# Altium PCB PCB1.PcbDoc
Units mm, origin at the board's own origin, x right, y up, seen from the top; angles counter-clockwise.
Board outline 64 x 36 mm, 2 copper layers (Top Layer, Bottom Layer); 12 components, 8 nets, 40 pads, 0 vias.
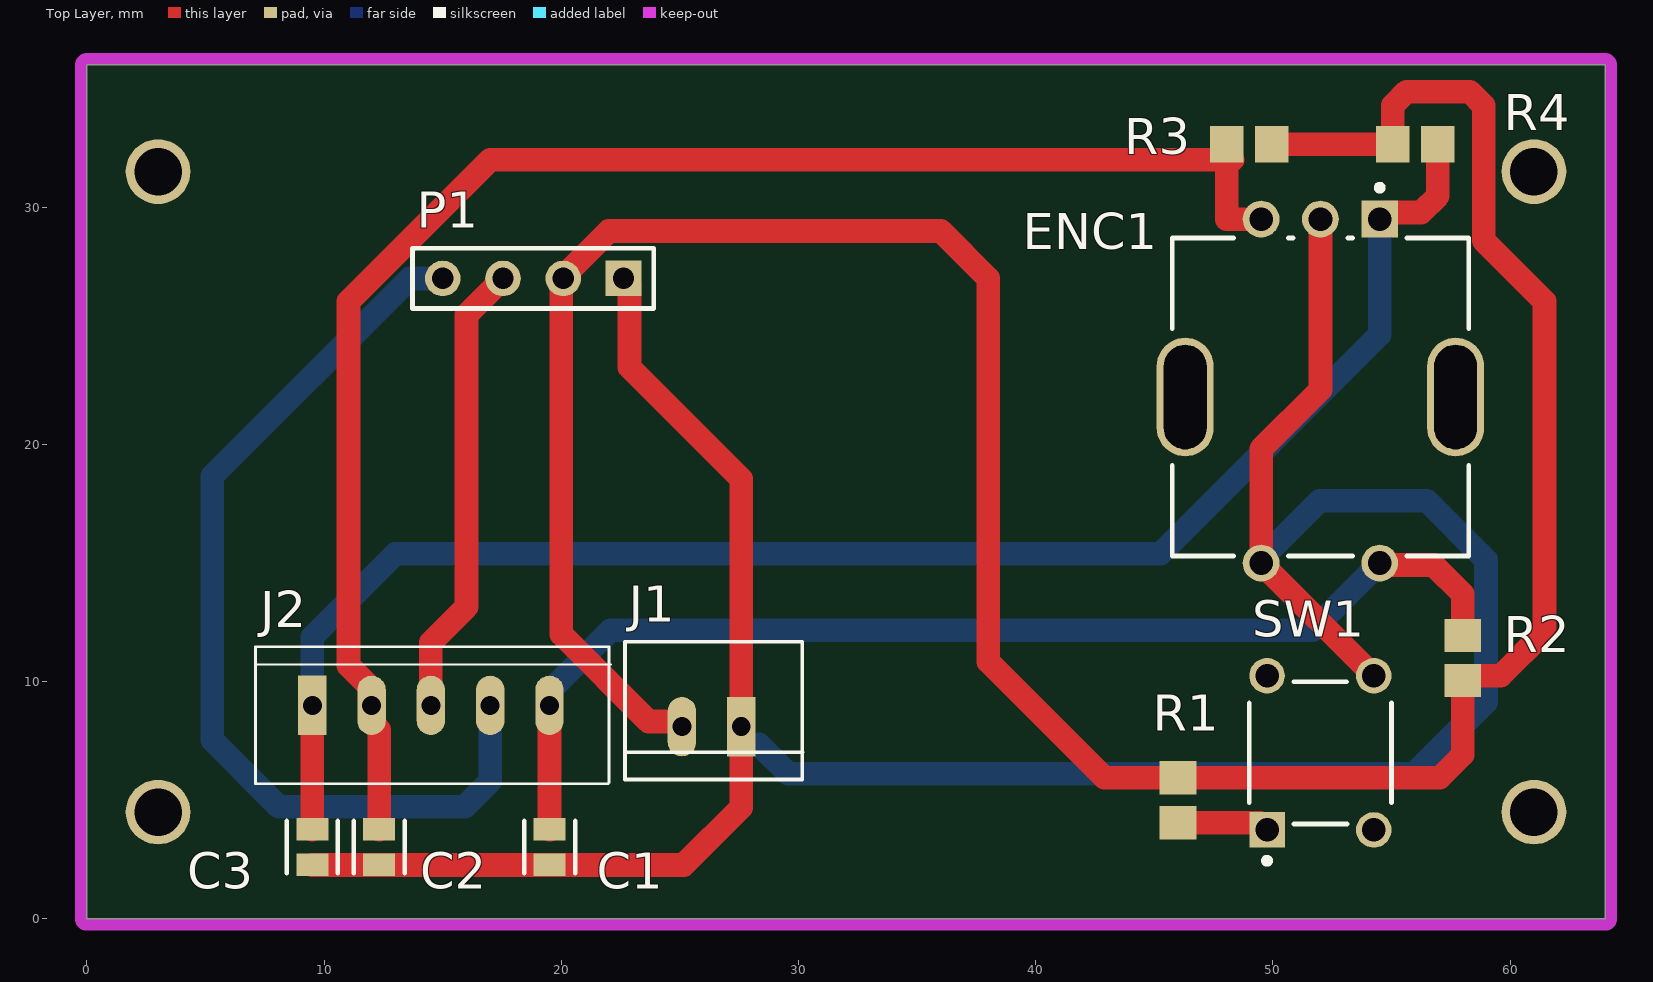
[diagram p0: Top Layer view]
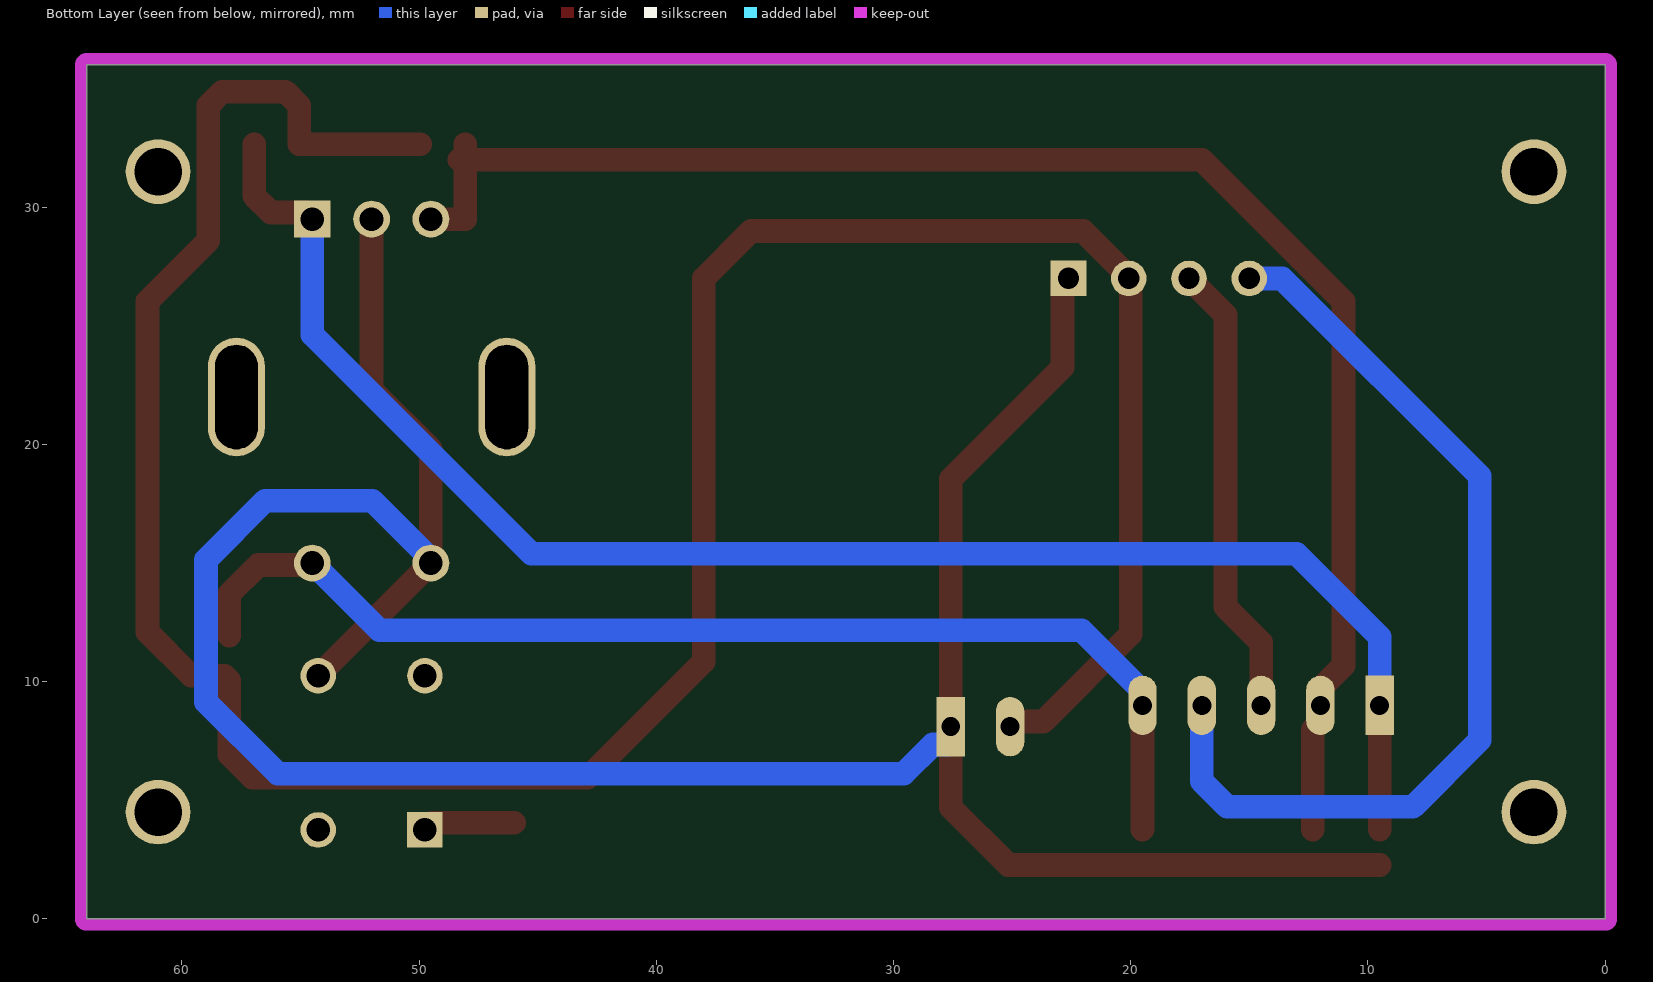
[diagram p1: Bottom Layer view, seen from below]
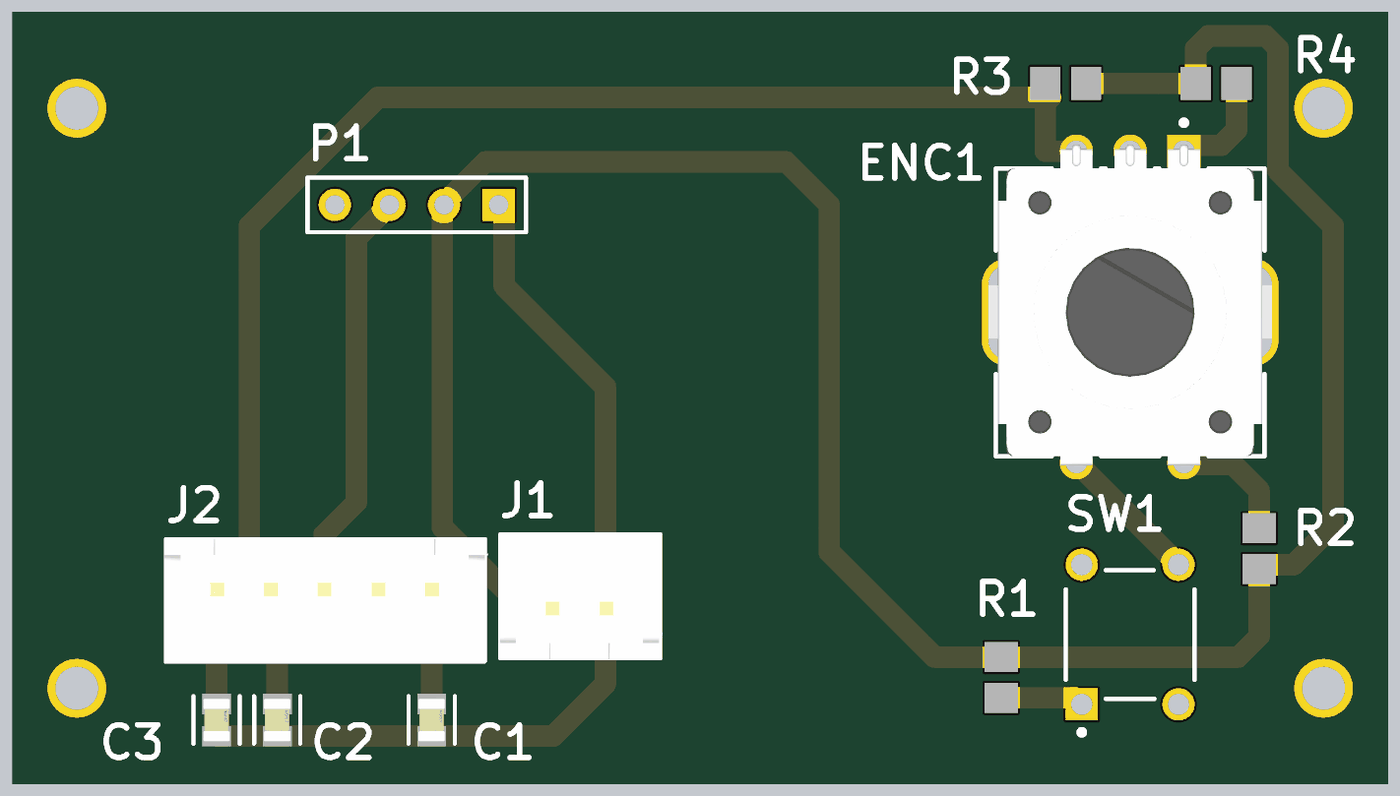
[diagram p2: 3D render of the assembled board from above, using the file's embedded part models]

## Layer stack, top to bottom
Top Solder: solder mask 0.0102, Solder Resist, Dk 3.5
Top Layer: signal copper 0.0356
Dielectric 1: dielectric 0.32, FR-4, Dk 4.8
Bottom Layer: signal copper 0.0356
Bottom Solder: solder mask 0.0102, Solder Resist, Dk 3.5

## Board outline
0,0 64,0 64,36 0,36

## Design rules (kind name [scope] priority, off if disabled: settings)
Clearance [All] p1: gap=0.254 ignorepadtopadclearanceinfootprint=FALSE except(0.3: Arc-Arc Arc-Track Track-Track)
PolygonConnect [All] p1: connectstyle=Relief reliefconductorwidth=0.254 reliefentries=4 polygonreliefangle="90 Angle" airgapwidth=0.254
RoutingVias [All] p1: holewidth=0.711 width=1.27 viastyle="Through Hole" minholewidth=0.711 minwidth=1.27 maxholewidth=0.711 maxwidth=1.27
SolderMaskExpansion [All] p1: expansion=0.102 istentingtop=FALSE
Width [All] p1: maxlimit=1 minlimit=1 preferedwidth=1 minimp=50.000000 maximp=50.000000 favimp=50.000000
30 further rules are at their usual default settings.

## Components (designator, comment, footprint, x,y, rotation, side; value= is the part's Value field where it differs from the comment)
C1 "C0805C104K5RACTU" FP-C0805C-DN-MFG 19.507,3.023 r270 top value="0.10 μF"
C2 "C0805C104K5RACTU" FP-C0805C-DN-MFG 12.319,3.023 r270 top value="0.10 μF"
C3 "C0805C104K5RACTU" FP-C0805C-DN-MFG 9.5,3.023 r270 top value="0.10 μF"
ENC1 "PEC11R-4215F-S0024" FP-PEC11R-4215F-S0024-MFG 52,22 r180 top
J1 "Power" JST_2P 27.584,8.103 r270 top
J2 "JST_5P" JST_5P 19.5,9 r90 top
P1 "OLED" HDR1X4 22.62,27 r180 top
R1 "ERA6AEB332V" RESC2013X60X40ML20T25 46,5 r270 top
R2 "ERA6AEB332V" RESC2013X60X40ML20T25 58,11 r270 top
R3 "ERA6AEB332V" RESC2013X60X40ML20T25 49,32.654 r0 top
R4 "ERA6AEB332V" RESC2013X60X40ML20T25 56,32.654 r180 top
SW1 "1825910-6" TECO-1825910-6_V 52,7 r90 top

## Footprints (in the part's own frame and the unit in brackets; to place one, negate y for a bottom-side part, rotate by r counter-clockwise, add the part's x,y. Pads: shape width x height; smd on the part's side, far side on the other; paste and mask are expansions set on the pad)
FP-C0805C-DN-MFG [mm]
  rect 0.95x1.35 smd paste+0 mask+0: 1(-0.75,0) 2(0.75,0)
  silkscreen extent -1.1,-1.07 1.1,1.07, body extent -1.4,-0.85 1.4,0.85, height 0.25
FP-PEC11R-4215F-S0024-MFG [mm]
  round 1.55 hole 1 paste-1000 mask+0: 1(-2.5,7) 2(2.5,7) B(2.5,-7.5) C(0,-7.5)
  rrect100% 2.4x5 hole 4.4 slot 1.8 at 0 deg paste-1000 mask+0: 3(-5.7,0) 4(5.7,0)
  rect 1.55x1.55 hole 1 paste-1000 mask+0: A(-2.5,-7.5)
  silkscreen extent -6.25,-8.95 6.25,6.7, body extent -7,-8.37 7,7.88, height 0.25
HDR1X4 [mm] "Connector; Header; 4 Position"
  rect 1.5x1.5 hole 0.9: 1(0,0)
  round 1.5 hole 0.9: 2(2.54,0) 3(5.08,0) 4(7.62,0)
  silkscreen extent -1.27,-1.27 8.89,1.27
JST_2P [mm]
  rect 2.5x1.2 hole 0.8: 1(0,0)
  oval 2.5x1.2 hole 0.8: 2(0,-2.5)
  silkscreen extent -3.58,-4.9 2.22,2.6, body extent -3.5,-4.9 2.25,2.5, height 7.01
JST_5P [mm]
  rect 2.5x1.2 hole 0.8: 1(0,10)
  oval 2.5x1.2 hole 0.8: 2(0,7.5) 3(0,5) 4(0,2.5) 5(0,0)
  silkscreen extent -3.3,-2.58 2.47,12.4, body extent -3.3,-2.47 2.45,12.43, height 6.91
RESC2013X60X40ML20T25 [mm] "Chip Resistor, 2-Leads, Body 2.00x1.25mm, IPC Low Density"
  rect 1.4x1.55 smd: 1(-0.95,0) 2(0.95,0)
  body extent -1.1,-0.72 1.1,0.72, height 0.6
TECO-1825910-6_V [mm] "Switch, 4-Leads, Body 5.99x5.99mm"
  rect 1.5x1.5 hole 0.99: 1(-3.25,2.25)
  round 1.5 hole 0.99: 2(3.25,2.25) 3(-3.25,-2.25) 4(3.25,-2.25)
  silkscreen extent -4.67,-3 3,3, body extent -3,-2.99 2.99,3, height 5

## Part data
C1 C2 C3: library part CMP-2007-00279-2, "CAP CER 0.1UF 50V X7R 0805", Capacitance="0.10 μF", Manufacturer=KEMET, Package=C0805C-DN, Temperature="-55°C to +125°C", Temperature Characteristic=X7R, Temperature Coefficient=30ppm/°C, Temperature Range High=+125°C, Temperature Range Low=-55°C, Tolerance=0.1, Voltage Rating="50 V", Automotive=No, Category=Cap, ComponentLink2Description=Datasheet, ComponentLink2URL=https://content.kemet.com/datasheets/KEM_C1003_C0G_SMD.pdf, Device Class L1="Passive Components", Device Class L2=Capacitors, Device Class L3="Ceramic Capacitors", Digikey Description="CAP CER 0.1UF 50V X7R 0805", Height=0.88mm, Ipc Land Pattern Name=CAPC200125X78, Lead Free=Yes, Manufacturer Part Number=C0805C104K5RACTU, Material=Ceramic, Mouser Description="Cap Ceramic 0.1uF 50V X7R 10% SMD 2.0 x 1.2 mm 125 C Paper T/R", Octopart=https://octopart.com/c0805c104k5ractu-kemet-143926, RoHS=TRUE
ENC1: library part CMP-1747-00012-2, "ROTARY ENCODER MECHANICAL 24PPR", Max Operating Temperature=70°C, Min Operating Temperature=-30°C, Package Quantity=150, Built in Switch=Yes, Detent=Yes, Encoder Type=Mechanical, Height=13.4mm, Hole Diameter=1.8mm, Length=21.5mm, Mount="Through Hole", Number of Channels=2, Orientation=Vertical, Output Type=Quadrature, Packaging=Bulk, Pulses per Revolution=24, Radiation Hardening=No, REACH SVHC="No SVHC", RoHS Compliant=Yes, Series=PEC11R, Termination="PC Pins", Type=Mechanical, Width=12.5mm
J1: library part JST_2P
P1: library part "Header 4", "Header, 4-Pin", LatestRevisionDate=17-Jul-2002, LatestRevisionNote="Re-released for DXP Platform.", Publisher="Altium Limited"
R1 R2 R3 R4: library part CMP-2001-00629-1, Manufacturer=Panasonic, Part Number=ERA6AEB332V
SW1: library part CMP-1684-00021-1, "Tact Switch, SPST-NO, 0.05 A, -35 to 85 degC, 4-Pin THD, RoHS, Bulk", Actuator Color=Black, Contact Rating @ Voltage=0.05A@24VDC, Dielectric Strength=500VAC, Manufacturer="TE Connectivity", Maximum AC Voltage Rating=N/A, Maximum Contact Resistance=100mOhm, Maximum DC Voltage Rating=24V, Minimum Insulation Resistance=100MOhm, Operating Temperature=-35to85C, Package Description="4-Pin Through Hole Device, Body 5.99 x 5.99 mm, Pitch 6.5 mm", Package Reference=THD, Actuator Length=1.4mm, Actuator Material=PolybutyleneTerephthalate, Actuator Style=RoundButton, Base Material=N/A, Body Orientation=Straight, Bushing Type=Unthreaded, Contact Material=CopperAlloy, Contact Plating=Silver, Datasheet URL=http://www.te.com/commerce/DocumentDelivery/DDEController?Action=showdoc&DocId=Customer+Drawing%7F1825910%7FC9%7Fpdf%7FEnglish%7FENG_CD_1825910_C9.pdf%7F1825910-6, Datasheet Version="Rev. C9", Dimension=5.99x5mm, Electrical Life=100000Cycles, Family=1825910, Function=MomentaryContact, Housing Material=N/A, Illumination=N/R, Manufacturer URL=http://www.te.com, Mechanical Life=100000Cycles, Mounting=ThroughHole, Packaging=N/A, Part No=1825910-6, Pole Throw Configuration=SPST, Product Weight=N/A, RoHS=Yes, Seal Description=N/A, Seal Location=N/A, Switch Configuration=OFF(ON), Terminal Type=PCPins, Thread Size=N/R

## Free pads (board coordinates)
  round 2.73 hole 2 paste-1000 mask+0: 2(3,4.5) 3(61,4.5) 4(61,31.5) 5(3,31.5)

## Nets (pads, with @x,y where several pads share a name; then routed paths per layer and width w, separated by ;. In a path a pad name is that pad's centre, name@x,y a point inside that pad or via, vN(x,y) a via of type N, cw(c..) or ccw(c..) an arc to the next point about the centre after c; other vN are vias at no path point)
+5V: J1.2 P1.2 R1.1 R2.2 R3.2 R4.2 | length 122
  Top Layer w1: P1.2@20,27.231 P1.2@20,27 ; J1.2 25.084,8.227 24.992,8.319 23.681,8.319 20,12 P1.2@20,27 ; R3.2 R4.2 55.05,34.288 55.636,34.874 58.295,34.874 58.881,34.288 58.881,28.597 61.443,26.035 61.443,12.09 59.602,10.25 58.2,10.25 R2.2 58,6.921 57.029,5.95 R1.1 42.894,5.95 37.998,10.846 37.998,27.002 36,29 22,29 20.04,27.04 P1.2@20,27
CLK: C3.1 ENC1.A J2.1 R4.1 | length 68.9
  Top Layer w1: C3.1 J2.1 ; J2.1 J2.1@9.5,9.65 ; ENC1.A 54.775,29.775 56.242,29.775 56.95,30.483 R4.1
  Bottom Layer w1: J2.1 9.5,11.888 13.005,15.392 45.263,15.392 54.5,24.63 ENC1.A
DT: C2.1 ENC1.B J2.2 R3.1 | length 67.1
  Top Layer w1: C2.1 12.319,7.977 12,8.296 12,9.704 11.024,10.681 11.024,26.024 17,32 R3.1@48.291,32 ; R3.1 48.05,32 48.05,29.5 ENC1.B
GND: C1.2 C2.2 C3.2 ENC1.2 ENC1.C J1.1 P1.1 SW1.4 | length 117.2
  Top Layer w1: C3.2 C2.2 C1.2 25.158,2.273 27.584,4.699 J1.1 27.584,18.542 22.87,23.256 22.87,26.75 P1.1 ; ENC1.C 52,22.307 49.5,19.807 ENC1.2 SW1.4
  Bottom Layer w1: J1.1 27.584,7.453 27.684,7.353 28.334,7.353 29.566,6.121 55.956,6.121 58.979,9.144 58.979,15.137 56.488,17.628 51.968,17.628 49.775,15.434 49.775,15.424 49.5,15.149 ENC1.2
PB: R1.2 SW1.1 | length 3.9
  Top Layer w1: R1.2 49.45,4.05 SW1.1
SCK: J2.3 P1.3 | length 19.3
  Top Layer w1: J2.3 14.5,11.655 16,13.155 16,25.46 P1.3
SDA: J2.4 P1.4 | length 41
  Bottom Layer w1: P1.4@15.129,27 13.614,27 5.283,18.669 5.283,7.544 8.103,4.724 15.926,4.724 17,5.799 J2.4
SW: C1.1 ENC1.1 J2.5 R2.1 | length 48.8
  Top Layer w1: J2.5 19.504,8.996 19.504,3.776 C1.1 ; ENC1.1 54.581,14.92 56.775,14.92 58,13.695 R2.1
  Bottom Layer w1: J2.5 19.5,9.596 22.071,12.167 51.667,12.167 ENC1.1
pads on no net: ENC1.3 ENC1.4 SW1.2 SW1.3

## Keep-outs
Keep-Out Layer:
  lines w0.5: -0.25,0 ccw(c0,0) 0,-0.25 ; -0.25,0 ccw(c0,0) 0,-0.25 ; -0.25,0 -0.25,36 ; -0.25,36 cw(c0,36) 0,36.25 ; -0.25,36 cw(c0,36) 0,36.25 ; 0,-0.25 64,-0.25 ; 0,36.25 64,36.25 ; 64,-0.25 ccw(c64,0) 64.25,0 ; 64,-0.25 ccw(c64,0) 64.25,0 ; 64,36.25 cw(c64,36) 64.25,36 ; 64,36.25 cw(c64,36) 64.25,36 ; 64.25,0 64.25,36